# EAGLE board sensor_board004 (EAGLE 4.16)
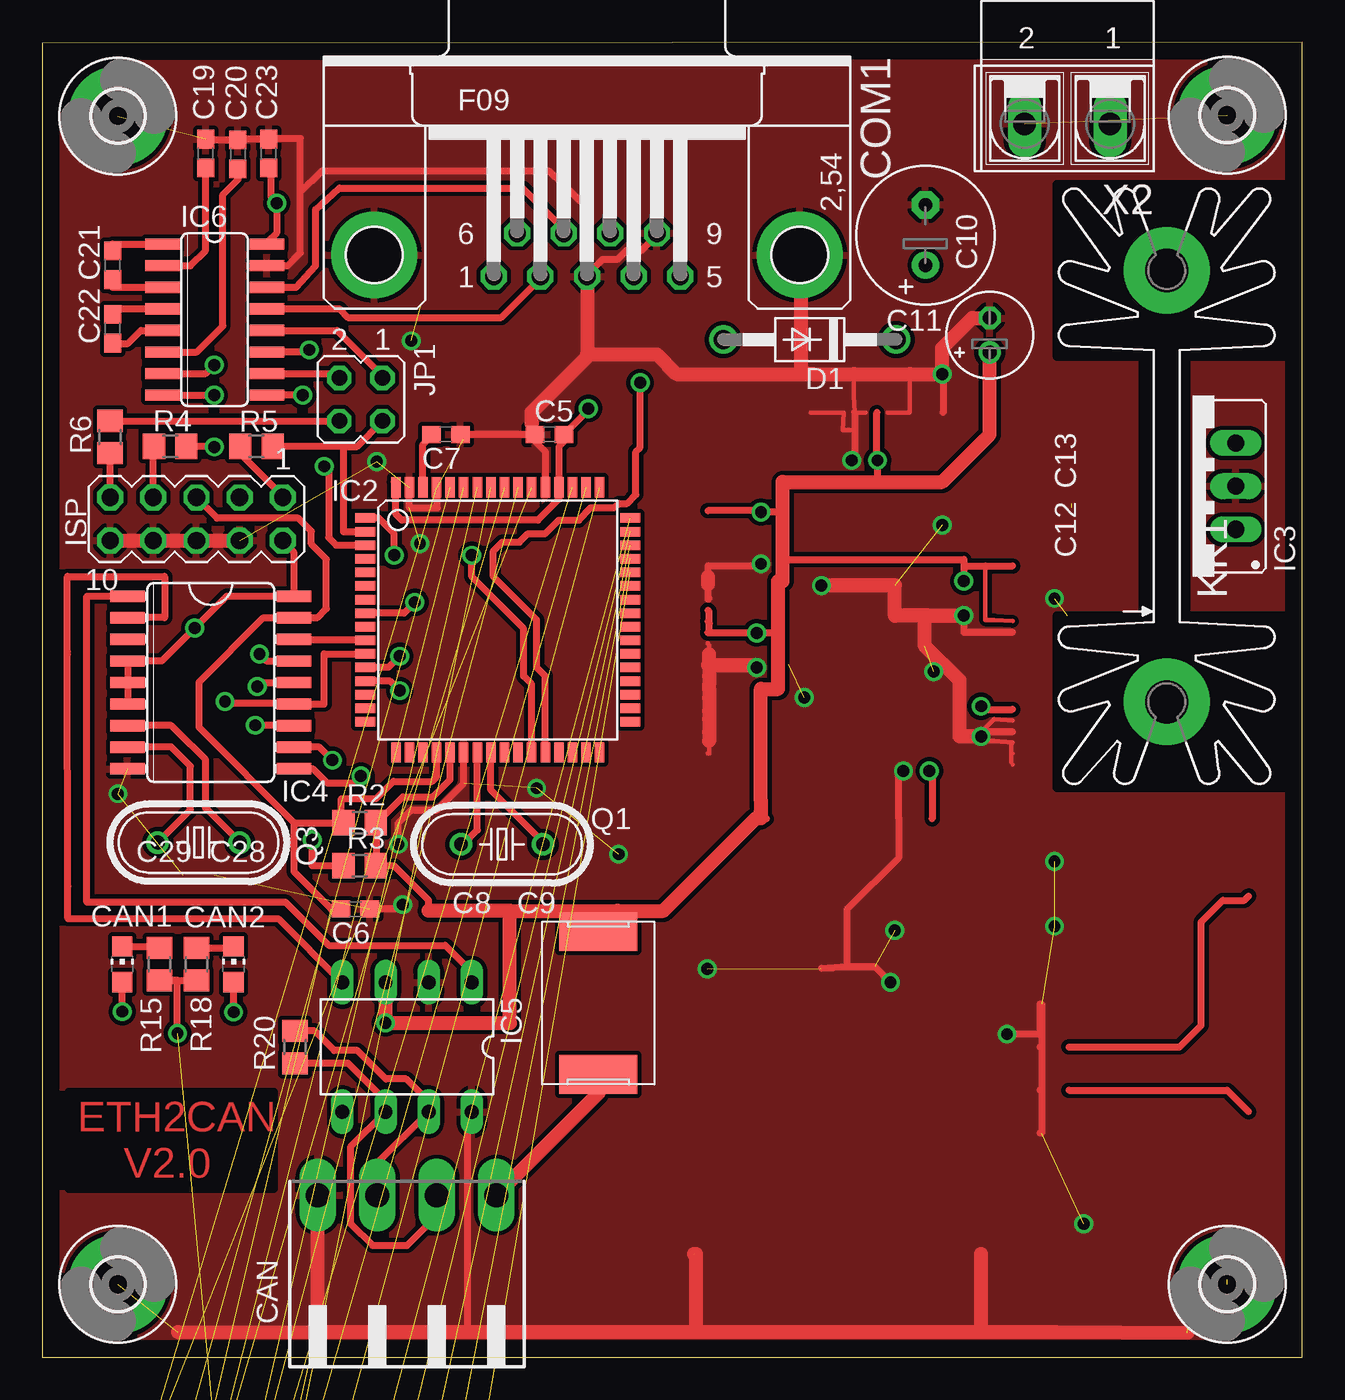
[diagram p0: board, top side]
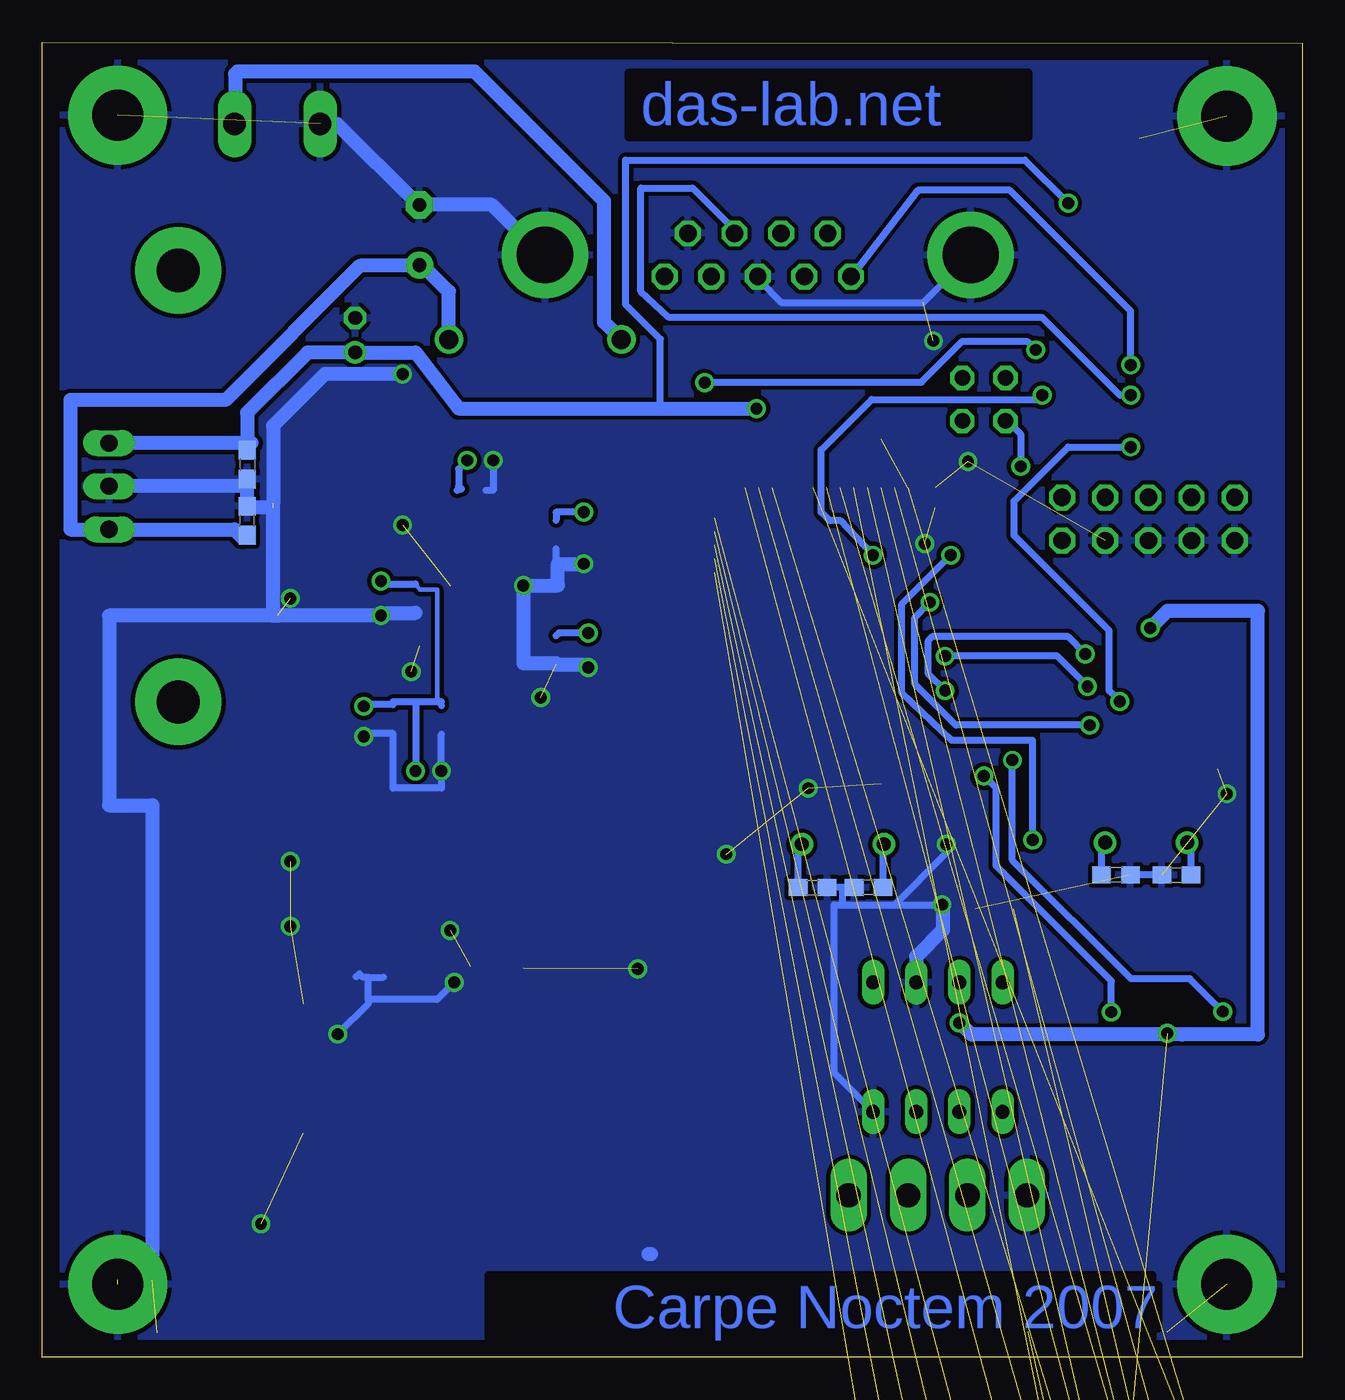
[diagram p1: board, bottom side, seen from below]

Size 74.15 x 77.39 mm. Coordinates in mm from the lower left corner, seen from the top.
Outline: 0,0 74.15,0 74.15,77.39 0,77.34 0,0
Copper layers (1*16): Top 0.035mm / dielectric 1.5mm / Bottom 0.035mm
Design rules "olimex_8mils": minimum track width 10mil, minimum drill 24mil, track to track 8mil, track to pad 8mil, pad to pad 8mil, via to via 8mil, smd to smd 8mil, copper to edge 40mil, drill to drill 10mil, minimum pad ring 10mil, minimum via ring 8mil, stop-mask expansion 0mil, vias tented up to drill 0mil, thermal gap 10mil
tRestrict: area 1.5,9.9 to 13.6,15.6
bRestrict: area 8.8,1 to 47.9,4.8; area 16.1,71.8 to 39.6,75.6

## Footprints (pad centres in the part's own frame; a part is rotated, then mirrored left to right if it is on the bottom)
MA08-2 = drill 1.016 octagon: 1 -8.89,-1.27; 2 -8.89,1.27; 3 -6.35,-1.27; 4 -6.35,1.27; 5 -3.81,-1.27; 6 -3.81,1.27; 7 -1.27,-1.27; 8 -1.27,1.27; 9 1.27,-1.27; 10 1.27,1.27; 11 3.81,-1.27; 12 3.81,1.27; 13 6.35,-1.27; 14 6.35,1.27; 15 8.89,-1.27; 16 8.89,1.27
C0603 = smd 1.1 x 1: 1 -0.85,0; 2 0.85,0
E3,5-8 = drill 0.813 pad 1.6 round: + -1.778,0 | drill 0.813 pad 1.6 octagon: - 1.778,0
E2-5 = drill 0.813 pad 1.27 round: + -1.016,0 | drill 0.813 pad 1.27 octagon: - 1.016,0
90-4 = drill 1.422 long: 1 -5.25,5.25; 2 -1.75,5.25; 3 1.75,5.25; 4 5.25,5.25
CHIP-LED0805 = smd 1.2 x 1.2: A 0,-1.05; C 0,1.05
F09HP = drill 1.016 octagon: 1 -5.486,-1.27; 2 -2.743,-1.27; 3 0,-1.27; 4 2.743,-1.27; 5 5.486,-1.27; 6 -4.115,1.27; 7 -1.372,1.27; 8 1.372,1.27; 9 4.115,1.27 | drill 3.302 pad 5.08 round: G1 -12.522,0; G2 12.522,0
DO41-10 = drill 1.118 round: A 5.08,0; C -5.08,0
3425L = smd 2.29 x 4.57: P$1 -4.2,0; P$2 4.2,0
MA03-1 = drill 1.016 long: 1 -2.54,0; 2 0,0; 3 2.54,0
3,0-PAD = drill 3 pad 5.842 round: B3,0 0,0
TQFP64 = smd 1.194 x 0.559: 1 -7.8,6; 2 -7.8,5.2; 3 -7.8,4.4; 4 -7.8,3.6; 5 -7.8,2.8; 6 -7.8,2; 7 -7.8,1.2; 8 -7.8,0.4; 9 -7.8,-0.4; 10 -7.8,-1.2; 11 -7.8,-2; 12 -7.8,-2.8; 13 -7.8,-3.6; 14 -7.8,-4.4; 15 -7.8,-5.2; 16 -7.8,-6; 33 7.8,-6; 34 7.8,-5.2; 35 7.8,-4.4; 36 7.8,-3.6; 37 7.8,-2.8; 38 7.8,-2; 39 7.8,-1.2; 40 7.8,-0.4; 41 7.8,0.4; 42 7.8,1.2; 43 7.8,2; 44 7.8,2.8; 45 7.8,3.6; 46 7.8,4.4; 47 7.8,5.2; 48 7.8,6 | smd 0.559 x 1.194: 17 -6,-7.8; 18 -5.2,-7.8; 19 -4.4,-7.8; 20 -3.6,-7.8; 21 -2.8,-7.8; 22 -2,-7.8; 23 -1.2,-7.8; 24 -0.4,-7.8; 25 0.4,-7.8; 26 1.2,-7.8; 27 2,-7.8; 28 2.8,-7.8; 29 3.6,-7.8; 30 4.4,-7.8; 31 5.2,-7.8; 32 6,-7.8; 49 6,7.8; 50 5.2,7.8; 51 4.4,7.8; 52 3.6,7.8; 53 2.8,7.8; 54 2,7.8; 55 1.2,7.8; 56 0.4,7.8; 57 -0.4,7.8; 58 -1.2,7.8; 59 -2,7.8; 60 -2.8,7.8; 61 -3.6,7.8; 62 -4.4,7.8; 63 -5.2,7.8; 64 -6,7.8
78XXS = drill 1.016 long: GND 0,-2.54; IN -2.54,-2.54; OUT 2.54,-2.54
SO18L = smd 0.66 x 2.032: 1 -5.08,-4.902; 2 -3.81,-4.902; 3 -2.54,-4.902; 4 -1.27,-4.902; 5 0,-4.902; 6 1.27,-4.902; 7 2.54,-4.902; 8 3.81,-4.902; 9 5.08,-4.902; 10 5.08,4.902; 11 3.81,4.902; 12 2.54,4.902; 13 1.27,4.902; 14 0,4.902; 15 -1.27,4.902; 16 -2.54,4.902; 17 -3.81,4.902; 18 -5.08,4.902
DIL08 = drill 0.813 long: 1 -3.81,-3.81; 2 -1.27,-3.81; 3 1.27,-3.81; 4 3.81,-3.81; 5 3.81,3.81; 6 1.27,3.81; 7 -1.27,3.81; 8 -3.81,3.81
SO16 = smd 0.66 x 2.032: 1 -4.445,-3.073; 2 -3.175,-3.073; 3 -1.905,-3.073; 4 -0.635,-3.073; 5 0.635,-3.073; 6 1.905,-3.073; 7 3.175,-3.073; 8 4.445,-3.073; 9 4.445,3.073; 10 3.175,3.073; 11 1.905,3.073; 12 0.635,3.073; 13 -0.635,3.073; 14 -1.905,3.073; 15 -3.175,3.073; 16 -4.445,3.073
MA05-2 = drill 1.016 octagon: 1 -5.08,-1.27; 2 -5.08,1.27; 3 -2.54,-1.27; 4 -2.54,1.27; 5 0,-1.27; 6 0,1.27; 7 2.54,-1.27; 8 2.54,1.27; 9 5.08,-1.27; 10 5.08,1.27
JP2Q = drill 0.914 octagon: 1 -1.27,-1.27; 2 -1.27,1.27; 3 1.27,-1.27; 4 1.27,1.27
SK104 = drill 2.54 pad 5.08 round: A2,5 -12.7,-0.762; B2,5 12.7,-0.762
HC49U-V = drill 0.813 round: 1 -2.413,0; 2 2.413,0
R0805 = smd 1.3 x 1.5: 1 -0.95,0; 2 0.95,0
AK500/2-H = drill 1.321 long: 1 -2.515,0; 2 2.515,0

## Placement (x,y rotation side)
ADC  [MA08-2]  9.47,-25.03 0 top  (outside the outline)
C5  100n  [C0603]  29.84,54.32 0 top
C6  100n  [C0603]  18.41,26.38 180 top
C7  100n  [C0603]  23.74,54.32 180 top
C8  22p  [C0603]  25.52,27.65 0 bottom
C9  22p  [C0603]  28.82,27.65 180 bottom
C10  220µF/25V  [E3,5-8]  51.96,66.05 90 top
C11  10µF/35V  [E2-5]  55.75,60.16 90 top
C12  100n  [C0603]  62.1,49.24 90 bottom
C13  100n  [C0603]  62.1,52.54 270 bottom
C19  100n  [C0603]  9.6,70.85 90 top
C20  100n  [C0603]  11.5,70.8 90 top
C21  100n  [C0603]  4.14,64.27 90 top
C22  100n  [C0603]  4.14,60.54 90 top
C23  100n  [C0603]  13.3,70.85 90 top
C28  22p  [C0603]  10.97,28.38 0 bottom
C29  22p  [C0603]  7.41,28.38 180 bottom
CAN  [90-4]  21.46,4.28 0 top
CAN1  [CHIP-LED0805]  4.69,23.13 0 top
CAN2  [CHIP-LED0805]  11.25,23.13 0 top
COM1  [F09HP]  32.05,64.88 0 top
D1  1N4001  [DO41-10]  45.16,59.91 180 top
F2  3425L  [3425L]  32.71,20.84 90 top
GP2D120  [MA03-1]  3.12,-33.92 0 top  (outside the outline)
GP2D120-2  [MA03-1]  3.12,-41.54 0 top  (outside the outline)
H1  MOUNT-PAD-ROUND3.0  [3,0-PAD]  69.72,4.28 0 top
H2  MOUNT-PAD-ROUND3.0  [3,0-PAD]  4.44,73.06 0 top
H3  MOUNT-PAD-ROUND3.0  [3,0-PAD]  4.44,4.28 0 top
H4  MOUNT-PAD-ROUND3.0  [3,0-PAD]  69.72,73.11 0 top
IC2  MEGA128-A  [TQFP64]  26.79,43.4 0 top
IC3  [78XXS]  67.69,51.27 90 top
IC4  MCP2515-E/SO  [SO18L]  9.9,39.71 270 top
IC5  PCA82C250  [DIL08]  21.46,18.25 180 top
IC6  MAX3232CSE  [SO16]  10.13,61.07 270 top
IO  [MA08-2]  9.47,-50.43 0 top  (outside the outline)
ISP  [MA05-2]  9.06,49.34 180 top
JP1  [JP2Q]  18.74,56.38 180 top
JTAG  [MA05-2]  8.2,-12.33 0 top  (outside the outline)
KK1  SK104  [SK104]  65.4,51.27 90 top
Q1  16MHz  [HC49U-V]  27.05,30.19 180 top
Q3  16MHz  [HC49U-V]  9.19,30.29 180 top
R2  10k  [R0805]  18.66,31.46 0 top
R3  1k  [R0805]  18.66,28.92 0 top
R4  4k7  [R0805]  7.51,53.61 0 top
R5  4k7  [R0805]  12.59,53.61 0 top
R6  4k7  [R0805]  3.98,54.17 90 top
R15  150  [R0805]  6.88,23.13 270 top
R18  150  [R0805]  9.06,23.13 270 top
R20  4k7  [R0805]  14.85,18.25 90 top
X2  [AK500/2-H]  60.32,72.61 180 top

## Library data of the parts
ADC GP2D120 GP2D120-2 IO ISP JTAG = con-lstb
C5-C13 C19-C23 C28 C29 R2-R6 R15 R18 R20 = rcl
CAN = con-weidmueller-sl35
CAN1 CAN2 = led
COM1 = con-subd
D1 = diode
F2 = ptc-littlefuse
H1-H4 = holes
IC2 = atmel
IC3 = v-reg
IC4 = mcp2515
IC5 = micro-philips
IC6 = maxim
JP1 = jumper
KK1 = heatsink
Q1 Q3 = crystal
X2 = con-ptr500

## Nets
CAN_INT: IC2.8 IC4.12
CS: IC2.10 IC4.16
GND: C5.1 C6.1 C7.1 C8.1 C9.1 C10.- C11.- C12.2 C13.2 C19.2 C20.2 C23.2 C28.2 C29.2 CAN.1 COM1.3 COM1.9 COM1.G1 COM1.G2 GP2D120-2.2 GP2D120.2 H1.B3,0 H2.B3,0 H3.B3,0 H4.B3,0 IC2.22 IC2.53 IC2.63 IC3.GND IC4.9 IC5.2 IC5.8 IC6.15 ISP.4 ISP.6 ISP.8 ISP.10 JTAG.2 JTAG.10 X2.2
MISO: IC2.13 IC4.15
MOSI: IC2.12 IC4.14
N$1: ADC.1 ADC.2 IC2.61
N$2: IC4.1 IC5.1
N$3: ADC.3 ADC.4 IC2.60
N$4: ADC.5 ADC.6 IC2.59
N$5: C7.2 IC2.62
N$6: C9.2 IC2.24 Q1.1
N$7: C8.2 IC2.23 Q1.2
N$8: C10.+ C12.1 D1.C IC3.IN
N$9: ADC.7 ADC.8 IC2.58
N$10: D1.A X2.1
N$11: ADC.9 ADC.10 IC2.57 JTAG.9
N$14: ADC.11 ADC.12 IC2.56 JTAG.5
N$15: ADC.13 ADC.14 IC2.55 JTAG.7
N$16: CAN.4 F2.P$1
N$17: C21.2 IC6.1
N$18: IC2.44 IO.15 IO.16
N$19: ADC.15 ADC.16 GP2D120-2.3 GP2D120.3 IC2.54 JTAG.1
N$20: IC2.45 IO.13 IO.14
N$21: IC4.2 IC5.4
N$22: ISP.9 R6.1
N$23: CAN.3 IC5.6 R20.1
N$24: IC2.46 IO.11 IO.12
N$25: ISP.1 R5.1
N$26: IC2.1 R3.1
N$27: CAN1.A IC4.11
N$28: IC2.47 IO.9 IO.10
N$29: ISP.7 R4.1
N$30: C22.2 IC6.4
N$31: IC2.48 IO.7 IO.8
N$32: IC2.49 IO.5 IO.6
N$33: IC2.2 JP1.2 R5.2
N$34: IC2.50 IO.3 IO.4
N$35: IC2.51 IO.1 IO.2
N$36: C22.1 IC6.5
N$37: C21.1 IC6.3
N$38: CAN2.A IC4.10
N$40: COM1.7 IC6.14
N$41: COM1.8 IC6.8
N$43: C19.1 IC6.2
N$44: IC2.3 JP1.4 R6.2
N$46: C20.1 IC6.6
N$48: CAN1.C R15.1
N$49: COM1.1 IC6.7
N$50: COM1.2 IC6.13
N$52: CAN2.C R18.1
N$53: C28.1 IC4.7 Q3.1
N$54: C29.1 IC4.8 Q3.2
N$59: CAN.2 IC5.7 R20.2
RST: C6.2 IC2.20 IC4.17 ISP.5 JTAG.6 R2.1
RXD: IC6.12 JP1.1
RXD1: IC2.27 IC6.9
SCK: IC2.11 IC4.13 R4.2
TXD: IC6.10 JP1.3
TXD1: IC2.28 IC6.11
VCC: C5.2 C11.+ C13.1 C23.1 F2.P$2 GP2D120-2.1 GP2D120.1 IC2.21 IC2.52 IC2.64 IC3.OUT IC4.4 IC4.5 IC4.6 IC4.18 IC5.3 IC6.16 ISP.2 JTAG.3 JTAG.8 R2.2 R3.2 R15.2 R18.2

## Tracks (layer width: path | path; a pad name or v marks a point on that pad's centre or on a via)
CAN_INT  (via drill 0.7)
  Top 0.406: IC4.12 14.78,37.2 v12.52,37.2 | IC2.8 18.87,43.8 | IC2.8 | v21.92,44.44 21.28,43.8 IC2.8
  Bottom 0.406: v12.52,37.2 20.39,37.2 22.8,39.61 22.8,43.55 v21.92,44.44
CS
  Top 0.406: 19.08,42.2 19.12,42.15 | 19.08,42.2 IC2.10 | IC4.16 19.02,42.25 19.08,42.2
GND  (via drill 0.7)  (30 unrouted)
  Top 0.254: 45.84,55.59 45.33,55.59 45.2,55.62 | 48.45,55.62 48.38,55.59 47.87,55.59 47.8,55.62 47.75,56.6 47.75,57.87 | 47.8,54.57 47.11,54.57 47.15,55.62 47.11,55.59 46.6,55.59 46.5,55.62 46.35,55.59 45.84,55.59 | 45.84,55.59 45.85,55.62 | 39.16,35.53 39.24,35.52 39.24,36.03 39.16,36.18 39.24,36.28 | 39.24,37.55 39.16,37.48 | 39.24,36.79 39.16,36.83 | 50.41,55.59 49.91,55.59 49.75,55.62 | 50.41,55.59 50.92,55.59 51.05,55.62 51.05,56.6 51.05,57.87 | 50.41,55.59 50.4,55.62 | 57.02,35.52 57.02,35.01 57.09,34.88 | 39.24,39.33 39.16,39.43 39.24,39.59 | 45.08,57.87 45.33,57.87 | 57.09,37.48 56,37.55 55.49,37.05 v55.24,36.54 55.75,36.28 56,36.28 57.09,36.18 57.02,36.03 57.02,35.52 | 39.16,42.03 39.24,41.87 39.24,41.36 39.16,41.38 | 39.24,40.09 39.16,40.08 | 57.02,35.52 57.09,35.53 | 39.24,38.06 39.16,38.13 | 39.24,38.82 39.16,38.78
  Top 0.406: IC2.53 29.59,53.3 29.08,53.81 29.08,54.06 28.82,54.32 | 28.82,54.32 C5.1 24.79,54.32 24.79,54.03 24.59,54.23 C7.1 | 47.8,55.62 47.8,54.57 47.8,52.98 v47.62,52.79 | v42.29,46.7 arc-90 42.16,46.58 39.16,46.58 39.16,46.01 39.24,45.94 39.23,45.93 39.16,45.93 | v42.03,40.6 41.91,40.73 | v50.67,34.51 50.4,34.51 50.4,31.69 50.4,31.7 50.41,31.71 50.41,29.43 47.37,26.38 47.37,22.99 | 57.09,36.83 55.24,36.83 v55.24,36.54 | 57.09,42.68 54.22,42.68 v54.22,43.65 | 39.16,45.5 39.24,45.43 39.16,45.35 39.16,45.28 39.16,44.74 39.24,44.67 39.2,44.63 39.16,44.63 | 58.8,18.25 58.8,20.79 58.71,20.79 58.71,19.01 v56.76,19.01 | 58.8,18.25 58.71,18.25 | 58.8,18.25 58.8,15.71 | 58.71,13.17 58.8,13.17 58.8,15.71 | 58.8,15.71 58.71,15.71 | 45.84,22.89 47.37,22.99 | 47.37,22.99 48.98,22.99 v49.91,22.06 | 53,55.62 53,57.87 v52.95,57.87 | 23.24,51.2 23.24,50 21.59,50 IC2.63 | 24.76,35.6 IC2.22 24.79,33.78 23.24,32.22 21.71,32.22 20.95,31.46 v20.95,30.19 | C6.1 20.95,26.38 v21.2,26.63 | IC5.8 25.01,14.19 25.01,1.49 | IC6.15 14.42,64.25 15.18,65.01 | 15.18,65.01 15.18,71.74 13.28,71.74 13.3,71.72 C23.2 11.67,71.7 11.63,71.74 11.54,71.65 C20.2 9.69,71.65 9.6,71.74 C19.2 | 28.82,54.32 28.82,54.98 28.82,55.16 | COM1.G2 45.59,64.81 45.33,64.55 | 15.18,65.01 15.18,68.57 16.45,69.84 29.79,69.84 32.08,67.68 32.08,63.74 | 32.08,63.74 COM1.3 | 32.08,63.74 32.96,64.63 33.85,64.63 34.36,65.14 35.25,65.14 36.16,66.05 COM1.9 | 59.63,1.49 59.63,1.64 59.71,1.69
  Top 0.813: 41.91,40.73 39.24,40.73 | 39.24,40.73 39.16,40.73 | 39.16,45.93 39.16,45.5 | CAN.1 16.21,1.49 16.12,1.49 | 7.97,1.46 16.12,1.49 | 16.12,1.49 25.01,1.49 38.48,1.49 | 38.48,1.49 55.24,1.49 | 55.24,1.49 59.63,1.49 67.38,1.44 | 38.35,6.06 38.48,6.06 38.48,1.49 | 55.24,1.49 55.24,6.06 | ISP.4 ISP.6 ISP.8 ISP.10 | v55.24,36.54 53.97,36.54 53.97,39.84 51.94,41.87 51.94,43.65 52.19,43.65 | 52.19,43.65 v54.22,43.65 | v45.84,45.43 50.16,45.43 50.16,43.65 52.19,43.65 | 39.24,36.28 39.24,36.79 39.24,37.55 39.24,38.06 39.24,38.82 39.24,39.33 | 39.24,40.73 39.24,40.09 39.24,39.59 | 39.24,40.73 39.24,41.36 | 55.6,61.18 55.7,61.07 55.75,61.13 C11.- 54.73,61.18 52.95,59.4 v52.95,57.87 51.05,57.87 47.75,57.87 45.33,57.87 44.65,57.87 44.65,64.88 COM1.G2 | 45.08,57.87 37.31,57.87 36.14,59.04 32.05,59.04 | COM1.3 32.05,59.04 | 32.05,59.04 32.05,58.89 28.77,55.61 28.77,54.98 28.82,54.98
  Bottom 0.406: 27.05,27.65 C8.1 | 27.05,27.65 C9.1 | 55.71,22.39 55.67,22.39 55.49,22.57 55.29,22.36 54.99,22.36 | 54.99,22.36 54.08,22.36 | 48.04,51.02 47.62,51.02 v47.62,52.79 | 43.91,47.58 43.91,46.7 43.81,46.7 | 42.2,40.77 v42.03,40.6 | v55.24,36.54 55.24,36.7 53.51,36.7 53.51,33.49 50.67,33.49 v50.67,34.51 50.67,36.65 | v54.22,43.65 54.22,43.82 | 9.19,28.38 C29.2 C28.2 | 43.91,40.86 43.91,40.77 | v49.91,22.06 50.92,21.04 54.99,21.04 | 54.99,21.04 54.99,22.36 | v56.76,19.01 54.99,20.79 54.99,21.04 | 24,26.63 v21.2,26.63 | 27.05,26.63 24,26.63 | 27.05,26.63 27.05,27.65 | v20.95,30.19 20.95,29.68 24,26.63 | IC5.8 27.55,16.73 27.55,26.63 27.05,26.63 | COM1.G1 22.32,62.09 30.68,62.09 31.95,63.36 31.95,63.51 COM1.3
  Bottom 0.813: v42.29,46.7 43.81,46.7 43.81,45.43 v45.84,45.43 45.84,40.86 43.91,40.86 | 43.91,40.77 42.2,40.77 | 54.22,43.82 52.19,43.82 | IC3.GND 62.1,51.27 C13.2 C12.2 62.1,50 60.57,50 60.57,43.65 60.32,43.65 | 38.35,6.06 38.48,6.06 | v54.22,43.65 60.32,43.65 | 60.32,43.65 70.23,43.65 70.23,32.47 67.69,32.47 67.69,4.53 69.72,4.53 | v52.95,57.87 57.53,57.87 60.57,54.83 60.57,50.25 | IC5.2 22.73,23.56 21.15,25.13 21.15,26.58 v21.2,26.63 | X2.2 56.82,72.61 52.01,67.81 51.99,67.83 C10.- 47.72,67.83 44.78,64.88 COM1.G2
  other vias: 59.56,44.67 52.95,48.98 44.83,38.82 39.12,22.85 33.9,29.6 29.08,33.49 50.16,25.11 59.56,25.36 59.56,29.17 52.45,40.35 61.29,7.84 4.44,33.16 21.71,59.83 19.68,52.72 22.22,47.89
  pour Top (isolate 0.254): 73.96,77.13 0.22,77.2 0.33,0.32 74.06,0.42
  pour Bottom (isolate 0.254): 0.17,77.18 73.93,77.18 73.88,0.24 0.2,0.22
MISO  (via drill 0.7)
  Top 0.406: IC2.13 20.46,39.8 v21.03,39.23 | IC4.15 13.18,40.98 v12.77,41.39
  Bottom 0.406: v21.03,39.23 22.04,40.25 22.04,42.15 21.79,42.41 13.79,42.41 v12.77,41.39
MOSI  (via drill 0.7)
  Top 0.406: IC2.12 20.36,40.6 v21.03,41.26 | IC4.14 12.87,39.71 v12.64,39.48
  Bottom 0.406: v12.64,39.48 14.42,41.26 v21.03,41.26
N$1  (2 unrouted)
N$2
  Top 0.406: IC5.1 25.27,22.67 23.69,24.24 16.84,24.24 14.3,26.78 2.61,26.78 2.61,44.79 IC4.1
N$3  (2 unrouted)
N$4  (2 unrouted)
N$5
  Top 0.406: C7.2 22.89,54.23 22.39,53.73 IC2.62
N$6
  Top 0.406: Q1.1 29.59,30.19 26.39,33.38 IC2.24
  Bottom 0.406: Q1.1 29.59,30.19 29.67,30.1 C9.2
N$7
  Top 0.406: Q1.2 24.76,30.19 25.59,31.02 IC2.23
  Bottom 0.406: Q1.2 24.63,30.06 24.76,29.93 24.67,29.85 C8.2
N$8
  Bottom 0.813: C12.1 62.19,48.39 62.35,48.22 62.86,48.73 IC3.IN 72.51,48.73 72.51,56.35 63.37,56.35 55.47,64.25 51.89,64.25 51.91,64.27 C10.+ 51.79,64.27 50.24,62.73 D1.C
N$9  (2 unrouted)
N$10
  Bottom 0.813: D1.A 41.09,60.92 41.09,68.06 48.71,75.68 62.68,75.68 62.81,75.55 62.81,72.63 X2.1
N$11  (3 unrouted)
N$12
  Top 0.406: 60.41,18.25 66.92,18.25 68.19,19.52 68.19,25.62 69.46,26.89 70.73,26.89 70.99,27.14
N$13
  Top 0.406: 60.41,15.71 69.72,15.71 70.99,14.44
N$14  (3 unrouted)
N$15  (3 unrouted)
N$16
  Top 0.813: CAN.4 32.71,15.53 F2.P$1
N$17
  Top 0.406: IC6.1 4.14,65.52 C21.2
N$18  (2 unrouted)
N$19  (5 unrouted)
N$20  (2 unrouted)
N$21
  Top 0.406: 1.47,41.39 1.49,27.72 1.49,25.82 13.86,25.82 17.6,22.09 | 1.47,41.39 1.47,41.52 | 17.6,22.09 17.6,22.06 IC5.4 17.62,22.06 17.6,22.09 | 17.6,22.09 17.6,22.21 | IC4.2 7.18,43.52 7.18,45.96 1.47,45.96 1.47,41.39
N$22
  Top 0.406: R6.1 3.98,52.97 4.01,52.95 3.98,52.92 ISP.9
N$23
  Top 0.406: CAN.3 23.21,8.32 21.46,6.57 19.43,6.57 18.16,7.84 18.16,12.41 IC5.6 20.19,14.52 20.16,14.54 20.16,15.13 17.99,17.3 R20.1
N$24  (2 unrouted)
N$25
  Top 0.406: R5.1 11.64,53.22 11.63,53.2 14.14,50.69 ISP.1
N$26  (via drill 0.7)
  Top 0.406: v15.87,30.44 15.87,28.92 R3.1 | IC2.1 19.78,49.4 20.7,48.48 v20.7,47.21
  Bottom 0.406: v20.7,47.21 23.57,44.34 23.57,39.1 20.65,36.31 15.87,36.31 v15.87,30.44
N$27  (via drill 0.7)
  Top 0.406: v4.69,20.33 CAN1.A | IC4.11 16.3,35.9 v17.06,35.14
  Bottom 0.406: v17.06,35.14 17.06,29.25 10.08,22.26 6.62,22.26 v4.69,20.33
N$28  (2 unrouted)
N$29
  Top 0.406: R4.1 6.56,53.6 6.52,53.56 ISP.7
N$30
  Top 0.406: IC6.4 4.14,61.71 C22.2
N$31  (2 unrouted)
N$32  (2 unrouted)
N$33
  Top 0.406: 17.72,53.61 R5.2 | 17.72,53.61 18.51,53.61 JP1.2 | IC2.2 17.72,48.6 17.72,53.61
N$34  (2 unrouted)
N$35  (2 unrouted)
N$36
  Top 0.406: IC6.5 5.79,60.44 5.02,59.68 4.26,59.68 4.25,59.69 C22.1
N$37
  Top 0.406: IC6.3 4.14,62.98 C21.1
N$38  (via drill 0.7)
  Top 0.406: v11.25,20.31 CAN2.A | v18.74,34.2 18.31,33.77 16.78,33.77 15.95,34.61 14.83,34.61 IC4.10
  Bottom 0.406: v11.25,20.31 11.25,22.14 18.03,28.92 18.03,33.49 v18.74,34.2
N$40
  Top 0.406: IC6.14 14.93,62.98 16.07,64.25 16.07,67.55 17.47,68.82 28.27,68.82 30.68,66.41 COM1.7
N$41  (via drill 0.7)
  Top 0.406: IC6.8 v10.1,56.63
  Bottom 0.406: v10.1,56.63 10.74,56.63 15.31,61.2 37.28,61.2 38.93,62.73 38.93,68.82 35.89,68.82 33.55,66.48 33.55,66.36 COM1.8
N$43
  Top 0.406: IC6.2 8.71,64.25 9.6,65.14 C19.1
N$44  (via drill 0.7)
  Top 0.406: R6.2 JP1.4 | IC2.3 17.29,47.8 16.84,48.25 16.84,52.18 v16.58,52.44
  Bottom 0.406: JP1.4 17.34,55.11 16.58,54.34 v16.58,52.44
N$46
  Top 0.406: IC6.6 9.09,59.17 10.61,60.69 10.61,68.44 11.5,69.33 C20.1
N$48
  Top 0.406: R15.1 6.84,24.08 6.74,24.18 CAN1.C
N$49  (via drill 0.7)
  Top 0.406: IC6.7 9.6,57.9 v10.1,58.41
  Bottom 0.406: COM1.1 22.63,68.69 17.22,68.69 10.1,61.58 v10.1,58.41
N$50
  Top 0.406: IC6.13 17.47,61.71 17.98,61.2 27,61.2 29.43,63.64 COM1.2
N$52
  Top 0.406: CAN2.C 11.25,24.07 11.22,24.04 11.19,24.08 R18.1
N$53
  Top 0.406: 11.6,30.32 11.63,30.34 | Q3.1 11.6,30.32 | 11.6,30.32 9.6,32.32 9.6,35.17 7.95,36.82 | 7.95,36.82 7.69,37.07 | IC4.7 7.59,37.17 7.95,36.82
  Bottom 0.406: C28.1 11.82,28.22 | C28.1 11.98,28.38 11.86,28.26 | Q3.1 11.6,30.24 11.82,30.02 C28.1
N$54
  Top 0.406: Q3.2 8.71,32.22 8.71,34.79 7.56,35.93 5.02,35.93 IC4.8
  Bottom 0.406: Q3.2 6.75,30.29 6.56,30.1 C29.1
N$59
  Top 0.406: CAN.2 19.68,9.56 19.68,11.39 IC5.7 22.73,14.52 22.78,14.57 22.75,14.59 22.75,15.02 21.41,16.37 20.21,16.37 18.54,18.05 17.17,18.05 16.01,19.2 R20.2
RST  (1 unrouted)
  Top 0.406: 17.65,26.38 C6.2 16.99,26.38 14.8,28.56 14.8,31.36 14.85,31.41 14.85,31.46 | 14.85,31.46 R2.1 17.6,31.46 17.6,32.88 19.63,32.88 20.65,33.9 22.93,33.9 23.19,34.16 IC2.20 | ISP.5 10.28,49.39 15.06,49.39 15.82,48.63 15.82,47.87 16.71,46.98 16.71,44.06 16.2,43.55 14.93,43.55 14.91,43.52 IC4.17 13,43.52 9.22,39.74 9.22,37.07 14.83,31.46 14.85,31.46
RXD
  Top 0.406: JP1.1 20.01,57.77 17.34,60.44 IC6.12
RXD1  (via drill 0.7)
  Top 0.406: IC2.27 28.79,39.62 28.32,40.09 28.32,42.89 25.27,45.94 v25.27,47.21 | v15.31,56.63 IC6.9
  Bottom 0.406: v25.27,47.21 27.17,49.24 27.81,49.24 28.32,49.75 28.32,53.4 25.34,56.38 15.57,56.38 v15.31,56.63
SCK  (via drill 0.7)
  Top 0.406: IC2.11 16.58,41.4 16.58,38.44 IC4.13 14.78,38.47 10.87,38.47 v10.74,38.6 | R4.2 9.95,53.61 v10.1,53.58
  Bottom 0.406: v10.1,53.58 13.79,53.58 16.96,50.41 16.96,48.37 11.37,42.79 11.37,39.23 v10.74,38.6
TXD
  Top 0.406: IC6.10 17.22,57.9 JP1.3
TXD1  (via drill 0.7)
  Top 0.406: IC2.28 29.59,40.09 29.08,40.6 29.08,43.4 26.54,45.94 26.54,47.46 27.05,47.97 28.06,47.97 28.57,48.48 29.59,48.48 30.37,49.26 31.57,49.26 32.25,50 33.65,50 33.9,50.25 34.41,50.25 34.92,50.76 34.92,53.3 35.17,53.56 v35.17,57.37 | IC6.11 15.57,59.17 v15.69,59.3
  Bottom 0.406: v15.69,59.3 16.2,59.8 20.01,59.8 22.42,57.39 35.2,57.39 | 35.2,57.39 35.25,57.39 | v35.17,57.37 35.2,57.39
VCC  (via drill 0.7)  (4 unrouted)
  Top 0.254: 57.09,43.33 56,43.4 55.49,43.4 55.49,46.58 | 42.29,32.73 42.03,32.73 41.95,31.69 | 42.6,31.69 42.54,31.71 42.29,31.71
  Top 0.406: 19.68,31.46 21.2,32.98 22.98,32.98 23.99,33.99 IC2.21 24,35.52 | 49.1,55.62 49.1,52.84 v49.14,52.79 49.14,51.52 | 39.16,49.83 42.21,49.83 v42.29,49.75 43.56,49.75 43.56,51.52 | 52.35,31.69 52.35,34.51 v52.19,34.51 | 57.09,38.13 55.24,38.13 v55.24,38.32 | 57.09,46.58 55.49,46.58 54.22,46.58 54.22,46.95 | 54.22,46.95 v54.22,45.68 | 39.24,43.25 39.24,43.14 | 39.16,43.98 39.24,43.9 39.24,43.25 | 39.24,43.25 39.16,43.33 | 39.24,43.25 39.24,42.75 39.16,42.68 39.16,42.63 v42.03,42.63 43.3,42.63 | v32.13,55.84 32.13,55.75 C5.2 30.69,54.23 30.86,54.06 30.39,53.6 IC2.52 30.39,50.5 29.15,49.26 21.15,49.26 20.79,49.62 IC2.64 20.79,51.52 20.7,51.52 | 43.56,46.95 54.22,46.95 | 42.54,31.71 42.57,31.69 42.6,31.69 | 19.68,31.46 R2.2 | 19.68,28.92 19.68,31.46 | 19.68,28.41 19.68,28.75 R3.2 19.68,28.92 | 22.73,26.28 22.73,26.89 20.7,28.92 19.68,28.92 | IC4.6 5.02,38.47 5.02,39.74 | 5.02,39.74 IC4.5 | 5.02,39.74 5.02,40.96 IC4.4 7.03,40.98 v8.96,42.91 10.49,44.44 | 10.49,44.44 10.61,44.56 | 10.49,44.44 10.84,44.79 IC4.18 14.8,47.36 14.14,48.02 ISP.2 | IC6.16 13.2,65.6 13.79,66.18 v13.79,67.93 13.47,68.25 13.47,69.84 C23.1 | 33.85,26.28 F2.P$2 | R18.2 9,22.18 8.99,22.16 8.97,22.18 R15.2 7.95,22.18 v7.95,19.06
  Top 0.813: C11.+ 55.75,54.32 52.95,51.52 49.14,51.52 43.56,51.52 43.56,46.95 43.56,45.68 43.3,45.68 43.3,42.63 43.3,39.33 42.29,39.33 42.29,32.73 42.29,31.71 | 41.95,31.69 36.54,26.28 33.85,26.28 27.5,26.28 | 27.5,26.28 22.73,26.28 | IC5.3 v20.19,19.67 27.5,19.67 27.5,26.28
  Bottom 0.254: 50.67,38.35 50.92,38.82 50.92,45.17 51.94,45.17 52.19,45.52
  Bottom 0.406: v49.14,52.79 49.65,52.29 49.65,51.27 49.49,51.1 49.74,51.02 | 43.91,49.28 43.91,49.75 v42.29,49.75 | 43.91,42.47 43.75,42.63 v42.03,42.63 | v55.24,38.32 55.24,38.4 53.51,38.4 53.51,38.57 52.19,38.57 | 52.19,45.52 54.22,45.52 v54.22,45.68 | 52.19,38.57 v52.19,34.51 | 50.67,38.35 50.67,38.57 52.19,38.57 | v13.79,67.93 16.33,70.47 39.82,70.47 39.82,61.96 37.79,59.93 37.79,55.84 | v7.95,19.06 7.08,19.06 7.08,18.99
  Bottom 0.813: 62.1,53.81 61.84,53.81 | 62.1,53.81 62.35,53.81 | 62.1,53.81 IC3.OUT | 62.1,53.81 C13.1 | 62.1,53.81 62.1,55.59 58.54,59.14 C11.+ 52.19,59.14 49.65,55.84 37.79,55.84 v32.13,55.84 32.25,55.84 | v8.96,42.91 7.95,43.93 2.61,43.93 2.61,18.99 7.08,18.99 19.48,18.99 20.19,19.7 v20.19,19.67 20.21,19.7

## Text on the board
Top: ETH2CAN | V2.0
Bottom: das-lab.net | Carpe Noctem 2007